# EAGLE board PowerIn (EAGLE 9.3.0)
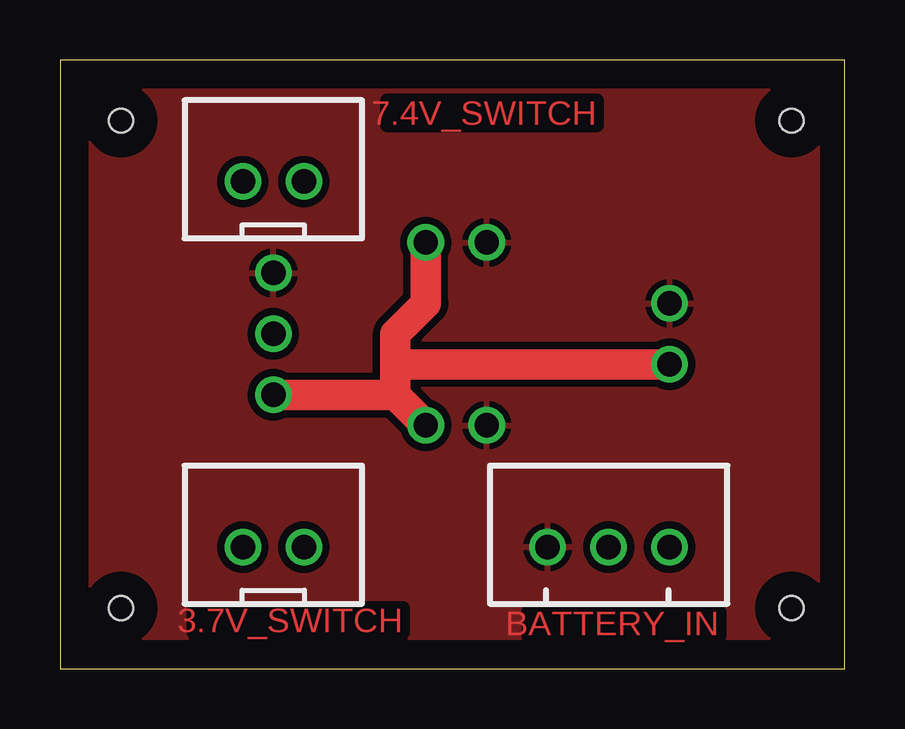
[diagram p0: board, top side]
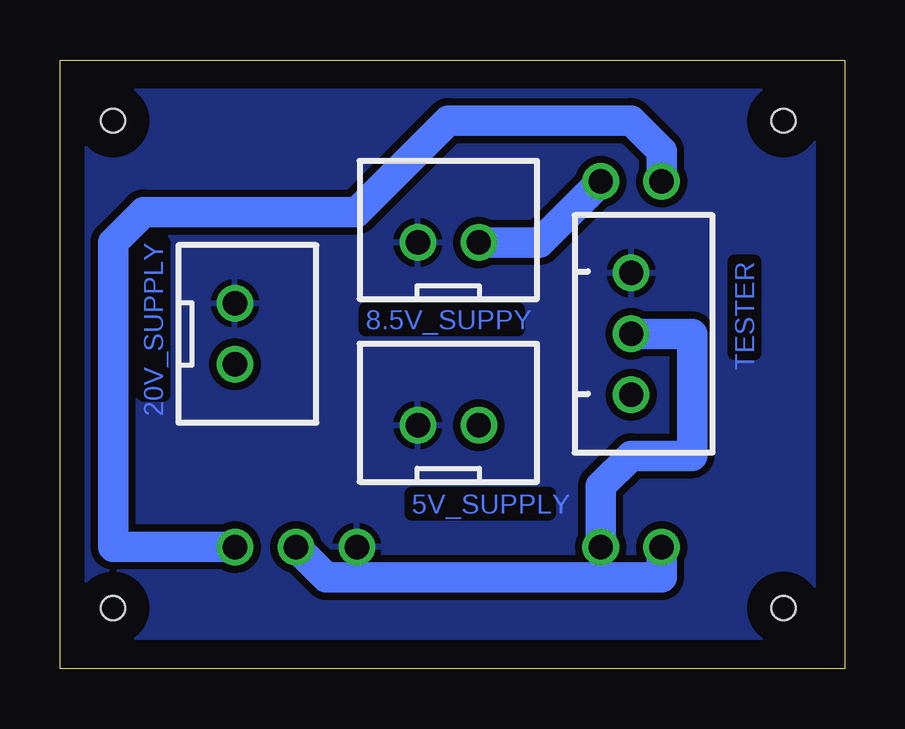
[diagram p1: board, bottom side, seen from below]

Size 32.69 x 25.39 mm. Coordinates in mm from the lower left corner, seen from the top.
Outline: 0,0 32.69,0 32.69,25.39 0,25.39 0,0
Copper layers (1*16): Top 0.035mm / dielectric 1.5mm / Bottom 0.035mm
Design rules "default": minimum track width 6mil, minimum drill 0.35mm, track to track 6mil, track to pad 6mil, pad to pad 6mil, via to via 6mil, smd to smd 6mil, copper to edge 40mil, drill to drill 6mil, minimum pad ring 10mil, minimum via ring 8mil, stop-mask expansion 4mil, vias tented up to drill 0mil, thermal gap 10mil
Net classes: 0 default: width 1.27 mm, drill 2.794 mm, clearance 0.305 mm
Holes 1 mm at 2.54,22.86 30.48,22.86 2.54,2.54 30.48,2.54

## Footprints (pad centres in the part's own frame; a part is rotated, then mirrored left to right if it is on the bottom)
JST-XH-02-PACKAGE-ROUND-PAD = drill 1.016: 1 -1.27,0; 2 1.27,0
JST-XH-03-PACKAGE-ROUND-PAD = drill 1.016: 1 -2.54,0; 2 0,0; 3 2.54,0

## Placement (x,y rotation side)
3.7V_SWITCH  JST-XH-02-PIN-ROUND-PAD  [JST-XH-02-PACKAGE-ROUND-PAD]  8.89,5.08 0 top
5V_SUPPLY  JST-XH-02-PIN-ROUND-PAD  [JST-XH-02-PACKAGE-ROUND-PAD]  16.51,10.16 0 bottom
7.4V_SWITCH  JST-XH-02-PIN-ROUND-PAD  [JST-XH-02-PACKAGE-ROUND-PAD]  8.89,20.32 0 top
8.5V_SUPPY  JST-XH-02-PIN-ROUND-PAD  [JST-XH-02-PACKAGE-ROUND-PAD]  16.51,17.78 0 bottom
20V_SUPPLY  JST-XH-02-PIN-ROUND-PAD  [JST-XH-02-PACKAGE-ROUND-PAD]  25.4,13.97 270 bottom
BATTERY_IN  JST-XH-03-PIN-ROUND-PAD  [JST-XH-03-PACKAGE-ROUND-PAD]  22.86,5.08 0 top
TESTER  JST-XH-03-PIN-ROUND-PAD  [JST-XH-03-PACKAGE-ROUND-PAD]  8.89,13.97 270 bottom

## Library data of the parts
3.7V_SWITCH 5V_SUPPLY 7.4V_SWITCH 8.5V_SUPPY 20V_SUPPLY BATTERY_IN TESTER = Rembrandt Electronics - JST XH Connectors v1-0

## Nets
GND: 5V_SUPPLY.1 8.5V_SUPPY.1 20V_SUPPLY.1 BATTERY_IN.1 TESTER.1
N$1: 7.4V_SWITCH.1 BATTERY_IN.3
N$2: 3.7V_SWITCH.1 BATTERY_IN.2
N$4: 3.7V_SWITCH.2 TESTER.2
N$5: 5V_SUPPLY.2 7.4V_SWITCH.2 8.5V_SUPPY.2 20V_SUPPLY.2 TESTER.3

## Tracks (layer width: path | path; a pad name or v marks a point on that pad's centre or on a via)
GND
  pour Top: 1.27,1.27 1.27,24.13 31.75,24.13 31.75,1.27
  pour Bottom: 1.27,1.27 1.27,24.13 31.75,24.13 31.75,1.27
N$1
  Bottom 1.27: 7.4V_SWITCH.1 7.62,21.59 8.89,22.86 16.51,22.86 20.32,19.05 29.21,19.05 30.48,17.78 30.48,5.08 BATTERY_IN.3
N$2
  Bottom 1.27: BATTERY_IN.2 21.59,3.81 7.62,3.81 3.7V_SWITCH.1
N$4
  Bottom 1.27: 3.7V_SWITCH.2 10.16,7.62 8.89,8.89 6.35,8.89 6.35,13.97 TESTER.2
N$5
  Top 1.27: 13.97,11.43 5V_SUPPLY.2 | TESTER.3 13.97,11.43 | 13.97,11.43 13.97,12.7 | 13.97,12.7 13.97,13.97 15.24,15.24 8.5V_SUPPY.2 | 20V_SUPPLY.2 13.97,12.7
  Bottom 1.27: 7.4V_SWITCH.2 12.7,17.78 8.5V_SUPPY.2